# EAGLE board OutletC (EAGLE 7.5.0)
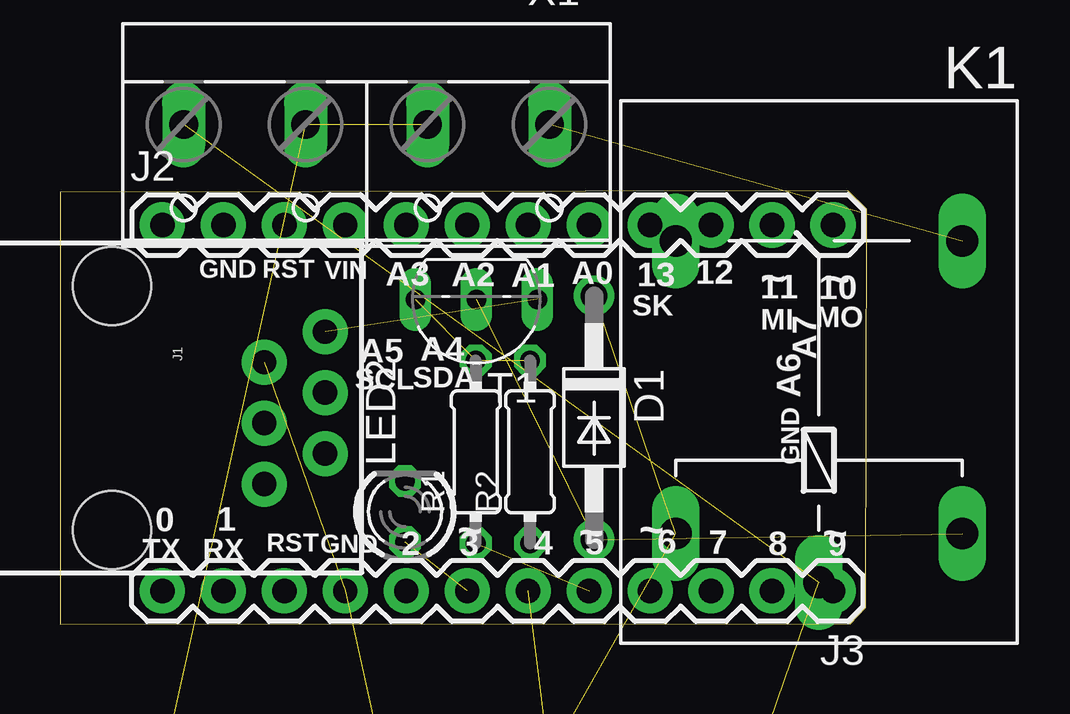
[diagram p0: board, top side]
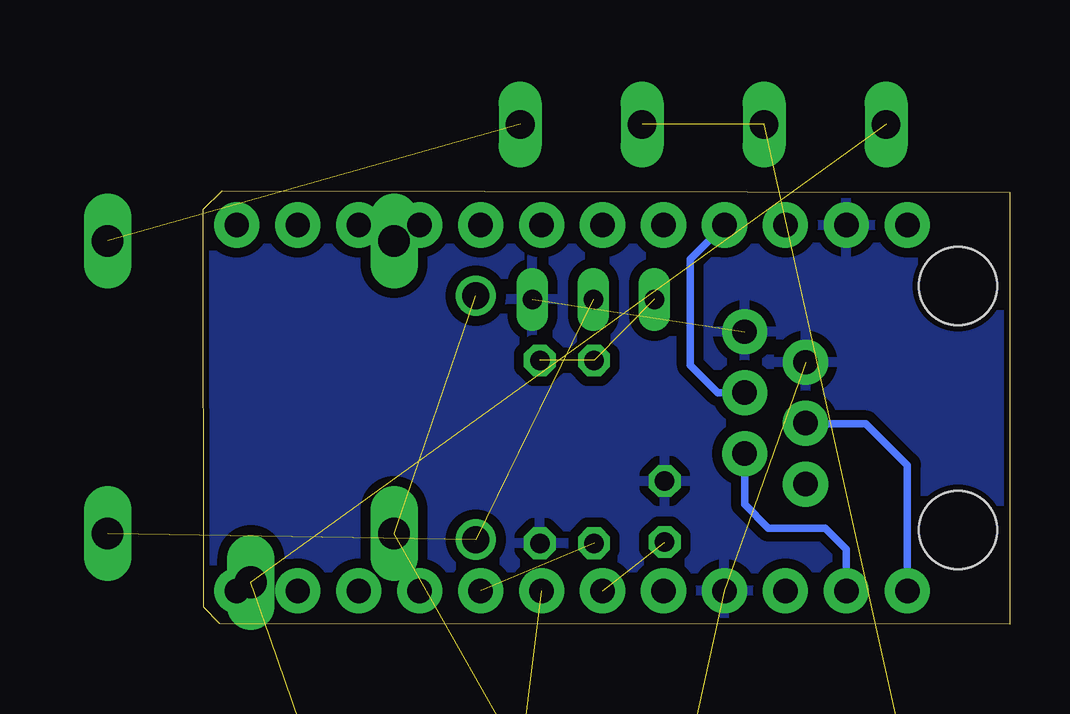
[diagram p1: board, bottom side, seen from below]

Size 33.6 x 18.06 mm. Coordinates in mm from the lower left corner, seen from the top.
Outline: 0,0 32.92,0.02 33.58,0.71 33.6,17.3 32.82,18.06 0,18.01 0,0
Copper layers (1*16): Top 0.035mm / dielectric 1.5mm / Bottom 0.035mm
Design rules "ITEADstudio_DRC *": minimum track width 6mil, minimum drill 12mil, track to track 16mil, track to pad 12mil, pad to pad 6mil, via to via 6mil, smd to smd 0mil, copper to edge 10mil, drill to drill 10mil, minimum pad ring 10mil, minimum via ring 6mil, stop-mask expansion 2mil, vias tented up to drill 100mil, thermal gap 15mil
Net classes: 1 power: width 0.381 mm, clearance 0.254 mm

## Footprints (pad centres in the part's own frame; a part is rotated, then mirrored left to right if it is on the bottom)
DO41-10 = drill 1.118: A 5.08,0; C -5.08,0
RJ11-6 = drill 1.016 pad 1.88: 1 -3.175,8.89; 2 -1.905,6.35; 3 -0.635,8.89; 4 0.635,6.35; 5 1.905,8.89; 6 3.175,6.35 | hole 3.251: -5.08,0; 5.08,0
1X12 = drill 1.016 pad 1.88: 1 0,0; 2 2.54,0; 3 5.08,0; 4 7.62,0; 5 10.16,0; 6 12.7,0; 7 15.24,0; 8 17.78,0; 9 20.32,0; 10 22.86,0; 11 25.4,0; 12 27.94,0
1X01 = drill 1.016 pad 1.88: 1 0,0
G5LE = drill 1.321 long: 1 -7.493,-5.969; 2 -7.493,5.969; O 4.699,5.969; P -9.525,0; S 4.699,-5.969
LED3MM = drill 0.813 octagon: A -1.27,0; K 1.27,0
0204/7 = drill 0.813 octagon: 1 -3.81,0; 2 3.81,0
TACTILE-PTH-SIDEEZ = drill 0.8 pad 1.7: 1 -2.5,0; 2 2.5,0 | drill 1.2 pad 2.2: ANCHOR1 -3.5,2.5; ANCHOR2 3.5,2.5
TO92-ECB = drill 0.813 long: B 2.54,0; C 0,0; E -2.54,0
W237-4P = drill 1.194 long: 1 -7.62,-0.635; 2 -2.54,-0.635; 3 2.54,-0.635; 4 7.62,-0.635

## Placement (x,y rotation side)
D1  1N4004  [DO41-10]  22.25,8.61 270 top
J1  RJ11  [RJ11-6]  2.16,9.02 270 top
J2  [1X12]  4.27,16.64 0 top
J3  [1X12]  32.21,1.4 180 top
JP1  M01PTH  [1X01]  3.25,-35.81 0 top  (outside the outline)
JP2  M01PTH  [1X01]  10.87,-35.81 0 top  (outside the outline)
JP4  M01PTH  [1X01]  18.49,-35.81 0 top  (outside the outline)
JP7  M01PTH  [1X01]  -4.29,-44.37 0 top  (outside the outline)
JP8  M01PTH  [1X01]  3.33,-44.37 0 top  (outside the outline)
JP9  M01PTH  [1X01]  10.95,-44.37 0 top  (outside the outline)
K1  G5L  [G5LE]  31.62,11.28 90 top
LED2  [LED3MM]  14.38,4.7 90 top
R1  [0204/7]  17.32,7.19 90 top
R2  [0204/7]  19.58,7.19 90 top
S2  SWITCH-MOMENTARY-2SIDE_EZ  [TACTILE-PTH-SIDEEZ]  20.4,-25.88 0 top  (outside the outline)
T1  2SC458  [TO92-ECB]  17.35,13.54 180 top
X1  Out- In- Out+ In+  [W237-4P]  12.78,20.19 180 top

## Library data of the parts
D1 = diode
J1 = SparkFun-Connectors; PROD_ID: CONN-08590
J2 J3 JP1 JP2 JP4 JP7-JP9 = SparkFun-Connectors
K1 = relay; OC_FARNELL: unknown; OC_NEWARK: unknown
LED2 = led
R1 R2 = resistor
S2 = SparkFun-Electromechanical
T1 = transistor
X1 = con-wago-508; MF: In-; MPN: Out-; OC_FARNELL: unknown; OC_NEWARK: unknown

## Nets
AGND [power]: LED2.K
GND [power]: J1.1 J1.2 J2.2 J3.9 JP2.1 JP8.1 R2.1 S2.1 T1.E
N$4: J1.4 J3.12
N$5: J3.6 S2.2
N$6: J1.5 J3.11
N$7: J2.1
N$8: R1.2 R2.2 T1.B
N$9: J2.5
N$11: J2.6
N$12: J2.7
N$13: J2.8
N$14: J2.9
N$15: J2.10
N$16: J2.11
N$17: J2.12
N$18: D1.A K1.1 T1.C
N$19: D1.C JP1.1 JP9.1 K1.2
N$20: J3.5 R1.1
N$21: J3.7 LED2.A
N$22: JP7.1 X1.2 X1.3
N$23: K1.S X1.1
N$24: JP4.1 K1.P X1.4
VIN: J1.3 J2.4

## Tracks (layer width: path | path; a pad name or v marks a point on that pad's centre or on a via)
AGND
  pour Bottom: 0.1,21.21 34.11,21.21 34.11,-3 -4.9,-2.92 -4.9,21.26
GND  (5 unrouted)
  pour Bottom: -4.98,20.8 33.78,20.65 33.78,-2.72 -4.98,-2.57
N$4
  Bottom 0.305: J3.12 4.27,6.63 5.99,8.36 8.48,8.36 J1.4
N$5  (1 unrouted)
N$6
  Bottom 0.305: J3.11 6.81,3.12 7.7,4.01 10.06,4.01 11.05,5 J1.5
N$8  (2 unrouted)
N$18  (2 unrouted)
N$19  (3 unrouted)
N$20  (1 unrouted)
N$21  (1 unrouted)
N$22  (2 unrouted)
N$23  (1 unrouted)
N$24  (2 unrouted)
VIN
  Bottom 0.305: J1.3 12.17,9.65 13.31,10.8 13.31,15.21 J2.4

## Text on the board
_tsilk: VIN | A3 | A2 | A1 | 13 | 12 | ~ | GND | RST | A0 | 11 | 10 | ~ | A4 | SK | MI | A7 | MO | A5 | A6 | SCL | SDA | GND | 0 | 1 | 6 | TX | RX | RST | GND | 2 | ~ | 3 | 4 | ~ | 5 | ~ | 7 | 8 | ~ | 9